# Altium PCB TCRT5000COM.PcbDoc
Units mil, origin at the board's own origin, x right, y up, seen from the top; angles counter-clockwise.
Board outline 4600 x 1000 mil, 2 copper layers (Top Layer, Bottom Layer); 44 components, 27 nets, 173 pads, 113 vias.
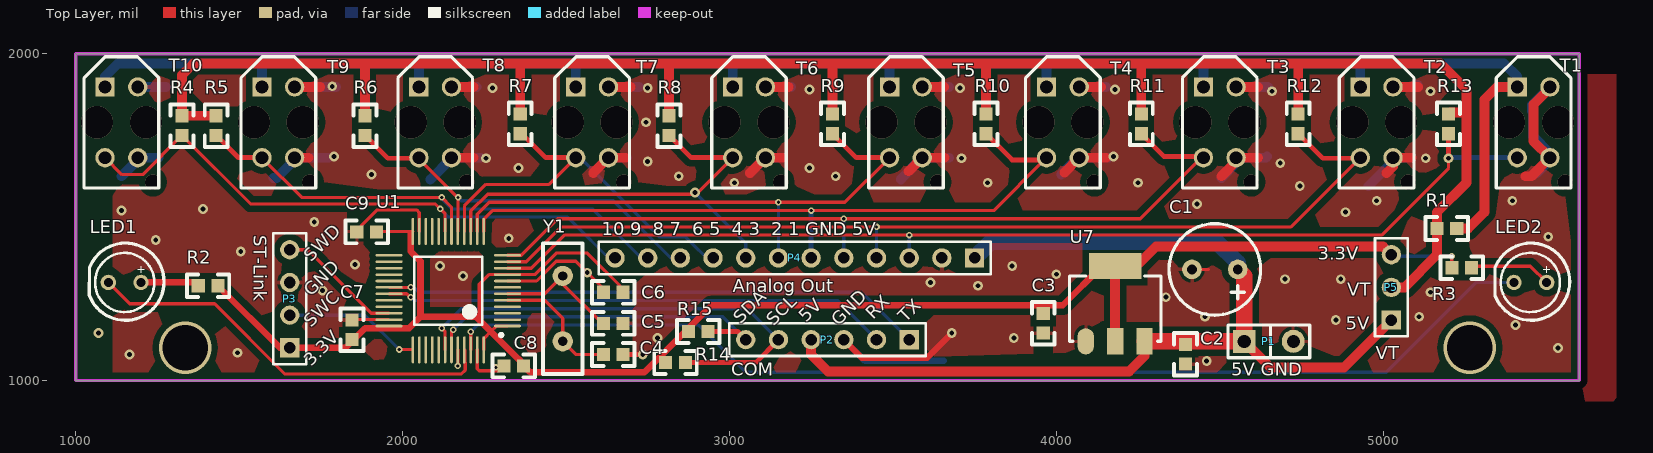
[diagram p0: Top Layer view]
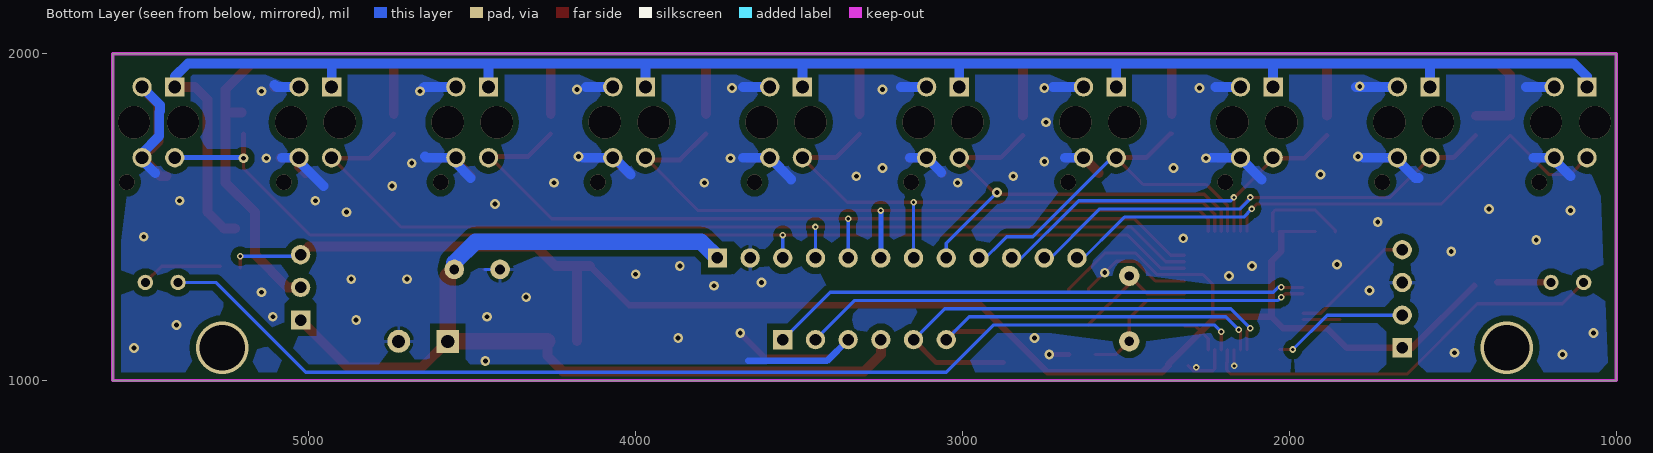
[diagram p1: Bottom Layer view, seen from below]

## Layer stack, top to bottom
Top Solder: solder mask 0.4, Solder Resist, Dk 3.5
Top Layer: signal copper 1.4
Dielectric 1: dielectric 12.6, FR-4, Dk 4.8
Bottom Layer: signal copper 1.4
Bottom Solder: solder mask 0.4, Solder Resist, Dk 3.5

## Board outline
1000,1000 1000,2000 5600,2000 5600,1000

## Design rules (kind name [scope] priority, off if disabled: settings)
Clearance Clearance_poly [Inpolygon] p1: gap=20
Clearance [All] p2: gap=8
PolygonConnect PolygonConnect_Via [IsVia] p1: connectstyle=Direct reliefconductorwidth=10 reliefentries=4 polygonreliefangle="90 Angle" airgapwidth=10
PolygonConnect [All] p2: connectstyle=Relief reliefconductorwidth=10 reliefentries=4 polygonreliefangle="90 Angle" airgapwidth=10
RoomDefinition TCRT5000COM [InComponentClass('TCRT5000COM')] p1: confinementstyle=ConfineIn formatcopy=TRUE lockcomponents=FALSE outline 1000,2000 1000,1000 5600,1000 5600,2000 1000,2000
RoutingVias [All] p1: holewidth=28 width=50 viastyle="Through Hole" minholewidth=28 minwidth=50 maxholewidth=28 maxwidth=50
SolderMaskExpansion [All] p1: expansion=4
Width [All] p1: maxlimit=50 minlimit=8 preferedwidth=10
29 further rules are at their usual default settings.

## Components (designator, comment, footprint, x,y, rotation, side; value= is the part's Value field where it differs from the comment)
C1 "47uF/10V" RB2 4555,1340 r180 top
C2 "Cap" 0603 4395,1050 r90 top
C3 "Cap" 0603 3960,1145 r90 top
C4 "20p" 0603 2615,1080 r0 top
C5 "20p" 0603 2615,1175 r0 top
C6 "Cap" 0603 2615,1270 r0 top
C7 "Cap" 0603 1845,1185 r270 top
C8 "Cap" 0603 2310,1045 r0 top
C9 "Cap" 0603 1860,1455 r0 top
LED1 "LED-white" LED-white 1200,1300 r180 top
LED2 "LED-white" LED-white 5500,1300 r180 top
P1 "5V GND" SIP2-150 4575,1120 r0 top
P2 "COM" HDR1X6 3550,1125 r180 top
P3 "ST-Link" HDR1X4 1655,1100 r90 top
P4 "Analog Out" HDR1X12 3750,1375 r180 top
P5 "VT" HDR1X3 5025,1185 r90 top
R1 "Res3" 0603 5225,1465 r180 top
R2 "Res3" 0603 1375,1290 r0 top
R3 "Res3" 0603 5270,1345 r180 top
R4 "Res3" 0603 1325,1810 r270 top
R5 "Res3" 0603 1430,1810 r270 top
R6 "Res3" 0603 1885,1810 r270 top
R7 "Res3" 0603 2360,1815 r270 top
R8 "Res3" 0603 2815,1810 r270 top
R9 "Res3" 0603 3315,1815 r270 top
R10 "Res3" 0603 3785,1815 r270 top
R11 "Res3" 0603 4260,1815 r270 top
R12 "Res3" 0603 4740,1815 r270 top
R13 "Res3" 0603 5200,1815 r270 top
R14 "Res3" 0603 2805,1055 r0 top
R15 "Res3" 0603 2875,1150 r0 top
T1 "Optoisolator1" TCRT5000 5460,1790 r90 top
T2 "Optoisolator1" TCRT5000 4980,1790 r90 top
T3 "Optoisolator1" TCRT5000 4500,1790 r90 top
T4 "Optoisolator1" TCRT5000 4020,1790 r90 top
T5 "Optoisolator1" TCRT5000 3540,1790 r90 top
T6 "Optoisolator1" TCRT5000 3060,1790 r90 top
T7 "Optoisolator1" TCRT5000 2580,1790 r90 top
T8 "Optoisolator1" TCRT5000 2100,1790 r90 top
T9 "Optoisolator1" TCRT5000 1620,1790 r90 top
T10 "Optoisolator1" TCRT5000 1140,1790 r90 top
U1 "STM32F103C8T6" QUAD48 2140,1275 r180 top
U7 "LM1117" SPP3 4090,1120 r0 top
Y1 "8M" XTAL1 2490,1320 r270 top

## Footprints (in the part's own frame and the unit in brackets; to place one, negate y for a bottom-side part, rotate by r counter-clockwise, add the part's x,y. Pads: shape width x height; smd on the part's side, far side on the other; paste and mask are expansions set on the pad)
0603 [mil]
  rect 40x40 smd: 1(0,0) 2(60,0)
  silkscreen extent -35,-35 95,35
HDR1X3 [mm] "Connector; Header; 3 Position"
  rect 1.5x1.5 hole 0.9: 1(0,0)
  round 1.5 hole 0.9: 2(2.54,0) 3(5.08,0)
  silkscreen extent -1.27,-1.27 6.35,1.27
HDR1X4 [mm] "Connector; Header; 4 Position"
  rect 1.5x1.5 hole 0.9: 1(0,0)
  round 1.5 hole 0.9: 2(2.54,0) 3(5.08,0) 4(7.62,0)
  silkscreen extent -1.27,-1.27 8.89,1.27
HDR1X6 [mm] "Connector; Header; 6 Position"
  rect 1.5x1.5 hole 0.9: 1(0,0)
  round 1.5 hole 0.9: 2(2.54,0) 3(5.08,0) 4(7.62,0) 5(10.16,0) 6(12.7,0)
  silkscreen extent -1.27,-1.27 13.97,1.27
HDR1X12 [mm] "Connector; Header; 12 Position"
  rect 1.5x1.5 hole 0.9: 1(0,0)
  round 1.5 hole 0.9: 2(2.54,0) 3(5.08,0) 4(7.62,0) 5(10.16,0) 6(12.7,0) 7(15.24,0) 8(17.78,0) 9(20.32,0) 10(22.86,0) 11(25.4,0) 12(27.94,0)
  silkscreen extent -1.27,-1.27 29.21,1.27
LED-white [mm]
  round 1.2 hole 0.7: 1(0,0) 2(2.54,0)
  silkscreen extent -1.79,-3.06 4.01,2.94, body extent -1.8,-3.07 4.01,2.95, height 5
QUAD48 [mm] "QFP, 48-Leads, Body 7x7mm, Pitch 0.5mm, IPC Low Density"
  oval 2.1x0.2 smd: 1(-4.6,2.75) 2(-4.6,2.25) 3(-4.6,1.75) 4(-4.6,1.25) 5(-4.6,0.75) 6(-4.6,0.25) 7(-4.6,-0.25) 8(-4.6,-0.75) 9(-4.6,-1.25) 10(-4.6,-1.75) 11(-4.6,-2.25) 12(-4.6,-2.75) 25(4.6,-2.75) 26(4.6,-2.25) 27(4.6,-1.75) 28(4.6,-1.25) 29(4.6,-0.75) 30(4.6,-0.25) 31(4.6,0.25) 32(4.6,0.75) 33(4.6,1.25) 34(4.6,1.75) 35(4.6,2.25) 36(4.6,2.75)
  oval 0.2x2.1 smd: 13(-2.75,-4.6) 14(-2.25,-4.6) 15(-1.75,-4.6) 16(-1.25,-4.6) 17(-0.75,-4.6) 18(-0.25,-4.6) 19(0.25,-4.6) 20(0.75,-4.6) 21(1.25,-4.6) 22(1.75,-4.6) 23(2.25,-4.6) 24(2.75,-4.6) 37(2.75,4.6) 38(2.25,4.6) 39(1.75,4.6) 40(1.25,4.6) 41(0.75,4.6) 42(0.25,4.6) 43(-0.25,4.6) 44(-0.75,4.6) 45(-1.25,4.6) 46(-1.75,4.6) 47(-2.25,4.6) 48(-2.75,4.6)
  silkscreen extent -4.23,-2.65 2.65,3.57, body extent -3.5,-3.5 3.5,3.5, height 1.6
RB2 [mil]
  round 60 hole 30: 1(0,0) 2(140,0)
  silkscreen extent -70,-140 210,140
SIP2-150 [mil]
  rect 70x70 hole 40: 1(0,0)
  round 70 hole 40: 2(150,0)
  silkscreen extent -50,-50 200,50
SPP3 [mil]
  oval 50x80 smd: 1(0,0)
  rect 50x80 smd: 2(90,0) 3(180,0)
  rect 160x80 smd: ""(90,230)
  silkscreen extent -50,0 230,200
TCRT5000 [mm]
  rect 1.5x1.5 hole 1: 1(2.75,1.27)
  round 1.5 hole 1: 2(2.75,-1.27) 3(-2.75,-1.27) 4(-2.75,1.27)
  silkscreen extent -5.1,-2.9 5.1,2.9
XTAL1 [mil]
  round 62 hole 28: 1(0,0) 2(200,0)
  silkscreen extent -100,-60 300,60

## Part data
C1: library part "CAP POL"
C2 C3 C6 C7 C8 C9: "Capacitor"
C4 C5: library part Cap, "Capacitor"
LED1 LED2: "Typical INFRARED GaAs LED"
P1: library part "Header 2", "Header, 2-Pin"
P2: library part "Header 6", "Header, 6-Pin"
P3: library part "Header 4", "Header, 4-Pin"
P4: library part "Header 12", "Header, 12-Pin"
P5: library part "Header 3", "Header, 3-Pin"
R1 R2 R3 R4 R5 R6 R7 R8 R9 R10 R11 R12 R13 R14 R15: "Resistor"
T1 T2 T3 T4 T5 T6 T7 T8 T9 T10: "4-Pin Phototransistor Optocoupler"
U1: "STM32 ARM-based 32-bit MCU Performance Line with 64 kB Flash, 20 kB Internal RAM, -40 to +85°C Temperature, 48-Pin LQFP, Tray"
Y1: library part XTAL, "Crystal Oscillator"

## Via types
v1: diameter 30, hole 15, Top Layer to Bottom Layer, 64 vias
v2: diameter 98.43, hole 98.43, Top Layer to Bottom Layer, 20 vias
v3: diameter 20, hole 10, Top Layer to Bottom Layer, 17 vias
v4: diameter 47.24, hole 47.24, Top Layer to Bottom Layer, 10 vias
v5: diameter 160, hole 140, Top Layer to Bottom Layer, 2 vias

## Nets (pads, with @x,y where several pads share a name; then routed paths per layer and width w, separated by ;. In a path a pad name is that pad's centre, name@x,y a point inside that pad or via, vN(x,y) a via of type N, cw(c..) or ccw(c..) an arc to the next point about the centre after c; other vN are vias at no path point)
3V3: C3.2 C6.2 C7.2 C8.2 C9.2 P3.1 P5.3 R2.2 R3.2 R14.1 R15.1 U1.1 U1.9 U1.24 U1.36 U1.48 U7. U7.2 | length 5549.7
  Top Layer w10: C9.2@1921.1,1456.1 U1.24 ; 2235,1185 2235,1295 2264.21,1324.21 U1.9 2404.21,1324.21 2470,1390 2565,1390 2675,1280 C6.2 ; U1.48 2248.27,1128.27 2270,1150 2286.73,1166.73 U1.1 ; R3.2 v3(5210,1380)
  Top Layer w20: R2.2 1625,1100 P3.1 1825.46,1100 1885.46,1160 2020,1160 2055,1195 ; 2025,1450 2025,1395 2055,1365 2055,1195 ; U7.@4140,1350 4020,1230 2945,1230 2740,1025 2390,1025 C8.2 2370,1050.46 2337.46,1083 2337,1083 2270,1150 2225,1195 2055,1195
  Top Layer w30: U7.@4140,1350 U7. ; U7.2 U7. ; P5.3 5000,1410 4305,1410 4245,1350 U7.
  Bottom Layer w10: P5.3 5030,1380 v3(5210,1380)
5V: C1.1 C2.2 P1.1 P2.4 P4.1 P5.1 U7.3 | length 3100.1
  Top Layer w30: P2.4 3250,1080 3302,1028 4223,1028 4270,1075 U7.3 ; P1.1 4655,1040 4880,1040 P5.1
  Top Layer w50: U7.3 P1.1 4575,1320 C1.1
  Bottom Layer w50: P4.1 3800,1425 4490,1425 4555,1360 C1.1
AIN0: P4.3 R13.2 T1.4 U1.10 | length 3410.7
  Top Layer w10: U1.10 2393.9,1343.9 2495,1445 v3(3550,1445) 4995,1445 5200,1650 v1(5200,1680)
  Top Layer w15: v1(5200,1680) R13.2
  Bottom Layer w10: P4.3@3550,1355 v3(3550,1445)
  Bottom Layer w15: v1@5200,1681.73 T1.4
AIN1: P4.4 R12.2 T2.4 U1.11 | length 3072.6
  Top Layer w10: U1.11 2378.58,1363.58 2485,1470 v3(3450,1470) 4718.27,1470 T2.4@4928.27,1680
  Top Layer w15: R12.2 4815,1680 T2.4@4928.27,1680
  Bottom Layer w10: P4.4@3450,1355 v3(3450,1470)
AIN2: P4.5 R11.2 T3.4 U1.12 | length 2606.3
  Top Layer w10: U1.12 2363.27,1383.27 2475,1495 v3(3350,1495) 4256.73,1495 T3.4@4446.73,1685
  Top Layer w15: R11.2 4330,1685 T3.4@4446.73,1685
  Bottom Layer w10: P4.5@3350,1355 v3(3350,1495)
AIN3: P4.6 R10.2 T4.4 U1.13 | length 2213.4
  Top Layer w10: U1.13 2248.27,1493.27 2275,1520 v3(3250,1520) 3808.27,1520 3963.27,1675 T4.4
  Top Layer w15: R10.2 3865,1675 T4.4@3963.27,1675
  Bottom Layer w15: P4.6@3250,1355 v3(3250,1520)
AIN4: P4.7 R9.2 T5.4 U1.14 | length 1794.2
  Top Layer w10: U1.14 2228.58,1508.58 2265,1545 v3(3150,1545) 3353.27,1545 T5.4
  Top Layer w15: R9.2 3388.27,1681.73 T5.4
  Bottom Layer w10: v3(3150,1545) 3150,1355 P4.7@3163.27,1355
AIN5: P4.8 R8.2 T6.4 U1.15 | length 1418.8
  Top Layer w10: U1.15 2208.9,1518.9 2260,1570 2898.27,1570 T6.4
  Top Layer w15: R8.2 2883.27,1681.73 T6.4
  Bottom Layer w10: v1(2895,1575) 3050,1420 P4.8
AIN6: P4.9 R7.2 T7.4 U1.16 | length 1235.7
  Top Layer w10: U1.16 2189.21,1534.21 2255,1600 2448.27,1600 T7.4
  Top Layer w15: R7.2 2365,1755 2438.27,1681.73 T7.4
  Bottom Layer w10: T7.4 2543.27,1681.73 2785,1440 2865,1440 P4.9@2950,1355
AIN7: P4.10 R6.2 T8.4 U1.17 | length 1231.3
  Top Layer w10: T8.4@2048.27,1680 2169.53,1558.74 U1.17
  Top Layer w15: R6.2 1955,1680 T8.4@2048.27,1680
  Bottom Layer w10: v3(2170,1560) 2180,1550 2645,1550 2840,1355 P4.10@2850,1355
AIN8: P4.11 R5.2 T9.4 U1.18 | length 1606.3
  Top Layer w10: T9.4 1691.73,1560 v3(2120,1560) 2149.84,1530.16 U1.18
  Top Layer w15: R5.2 1498.27,1681.73 T9.4
  Bottom Layer w10: v3@2115,1560 v3(2120,1560) ; v3@2117.5,1557.5 2117.86,1557.5 2150.36,1525 2580,1525 P4.11@2750,1355
AIN9: P4.12 R4.2 T10.4 U1.19 | length 1869.9
  Top Layer w10: T10.4 1141.73,1630 1205,1630 R4.2 1535,1540 2100,1540 v3(2115,1525) 2130.16,1509.84 U1.19
  Bottom Layer w10: v3(2115,1525) 2140,1500 2505,1500 P4.12@2650,1355
GND: C1.2 C2.1 C3.1 C4.2 C5.2 C6.1 C7.1 C8.1 C9.1 P1.2 P2.3 P3.3 P4.2 T1.2 T1.3 T2.2 T2.3 T3.2 T3.3 T4.2 T4.3 T5.2 T5.3 T6.2 T6.3 T7.2 T7.3 T8.2 T8.3 T9.2 T9.3 T10.2 T10.3 U1.8 U1.23 U1.35 U1.44 U1.47 U7.1 | length 6132
  Top Layer w10: C7.1@1846.42,1186.42 U1.35 ; C9.1 1860,1460 1922,1522 2043,1522 2051.42,1513.58 U1.23 ; v3(2168.96,1044.59) 2169.12,1044.59 2169.53,1045 U1.44 ; U1.47 2228.58,1036.42 2235,1030 2295,1030 C8.1 ; U1.8 2409.98,1304.53 2470.46,1365 2530,1365 2615,1280 C6.1 ; C1.2 4465,1340
  Top Layer w15: C4.2 v1(2735,1080)
  Top Layer w20: P2.3 3405,1070 3605,1070 v1(3680,1145)
  Top Layer w30: T9.3 1713.27,1681.73 ; T9.2 1748.27,1898.27 ; T8.3 2216.73,1681.73 ; T8.2 2216.73,1898.27 ; 2583.27,1635 T7.3 2681.73,1681.73 ; T7.2 2698.27,1898.27 ; 3063.27,1635 T6.3 3163.27,1681.73 ; T6.2 3181.73,1898.27 ; 3548.27,1640 T5.3 3658.27,1681.73 ; T5.2 3656.73,1898.27 ; 4025,1636.73 T4.3 4151.73,1681.73 ; T4.2 4136.73,1898.27 ; 4505,1625 4550,1670 T3.3 4616.73,1681.73 ; T3.2 4616.73,1898.27 ; 5010,1635 5030,1655 T2.3 5086.73,1681.73 ; T2.2 5106.73,1898.27 ; 5435,1625 5453.27,1625 T1.3 5460,1731.73 5460,1845 5510,1895 T1.2
  Bottom Layer w10: C1.2 4460,1340
  Bottom Layer w20: P2.3 3415,1060 3655,1060
  Bottom Layer w30: 1140,1625 1190,1675 T10.3 1253.27,1681.73 ; T10.2 1276.73,1898.27 ; 1605,1620 1615,1620 1670,1675 T9.3 1773.27,1681.73 ; T9.2 v1@1796.73,1898.27 ; 2085,1615 2150,1680 T8.3 2238.27,1681.73 ; T8.2 2226.73,1898.27 ; T7.3 2686.73,1681.73 ; T7.2 2723.27,1898.27 ; 3065,1636.73 T6.3 3161.73,1681.73 ; T6.2 3188.27,1898.27 ; 3525,1615 3525,1616.73 T5.3 3671.73,1681.73 ; T5.2 3671.73,1898.27 ; 4015,1630 4066.73,1681.73 T4.3 v1@4161.73,1681.73 ; T4.2 4151.73,1898.27 ; 4505,1620 4550,1665 T3.3 4641.73,1681.73 4645,1685 ; T3.2 4646.73,1898.27 v1@4650,1895 ; 4955,1595 5030,1670 T2.3 5081.73,1681.73 ; T2.2 5098.27,1898.27 5105,1905 ; 5470,1635 5510,1675 T1.3 5510,1695 5457.41,1747.59 5457.41,1822.32 5455,1824.73 5455,1843.27 T1.2
  other v1: 4460,1060 1165,1080 1495,1085 5535,1100 2780,1130 3870,1130 1070,1145 5405,1170 4855,1185 4455,1195 5110,1195 4335,1255 5145,1270 1755,1275 3760,1290 3615,1300 4700,1310 4870,1310 2185,1320 4000,1325 2565,1330 2115,1350 3865,1350 1855,1355 1505,1395 1245,1430 2325,1435 5505,1440 1730,1485 4885,1515 1140,1520 1390,1525 4430,1540 4980,1550 5395,1550 4745,1595 3015,1605 3790,1605 4250,1605 2845,1625 3325,1625 1905,1630 2355,1650 3245,1650 4685,1665 2750,1670 2255,1680 3710,1680 5130,1680 1790,1685 4175,1685 2745,1790 4660,1885 5145,1885 3245,1890 4180,1890 2275,1895 2750,1895 3705,1895 1785,1900
  other v3: 2285,1040
NetC4_1: C4.1 U1.5 Y1.2 | length 383.4
  Top Layer w10: U1.5 2434.53,1245.47 2490,1190 Y1.2 2530,1080 C4.1@2595,1080
NetC5_1: C5.1 U1.6 Y1.1 | length 393.4
  Top Layer w10: U1.6 2435.16,1265.16 Y1.1 2490,1295 C5.1@2615,1170
NetLED1_1: LED1.1 R2.1 | length 165
  Top Layer w20: LED1.1 R2.1@1365,1300
NetLED2_1: LED2.1 R3.1 | length 250.7
  Top Layer w10: R3.1@5270,1350 5450,1350 LED2.1
NetR1_1: R1.1 T1.1 T2.1 T3.1 T4.1 T5.1 T6.1 T7.1 T8.1 T9.1 T10.1 | length 5554.1
  Top Layer w30: R1.1 5260,1465 5310,1515 5310,1860 5348.27,1898.27 T1.1
  Bottom Layer w30: T10.1 1090,1930 1130,1970 2050,1970 ; T9.1 1570,1965 ; T8.1 2050,1970 ; T7.1 2530,1970 ; T6.1 3010,1970 ; T5.1 3490,1970 ; T4.1 3970,1965 3975,1970 ; T3.1 4450,1970 ; T2.1 4930,1970 ; T1.1 5410,1930 5370,1970 4930,1970 ; 2050,1970 2530,1970 ; 2530,1970 3010,1970 ; 3010,1970 3490,1970 ; 3490,1970 3975,1970 ; 3975,1970 4450,1970 ; 4450,1970 4930,1970
RXD1: P2.2 U1.31 | length 1549.2
  Top Layer w10: U1.31 2012.32,1265.16 2022.47,1255 v3(2025,1255)
  Bottom Layer w10: v3(2025,1255) 2035,1245 3330,1245 P2.2
SCL1: P2.5 R14.2 U1.42 | length 1468.5
  Top Layer w10: v3(2120,1160) 2130.16,1149.84 U1.42
  Top Layer w15: R14.2@2875,1055 3080,1055 P2.5
  Bottom Layer w10: v3(2120,1160) 2180,1220 3055,1220 P2.5
SDA1: P2.6 R15.2 U1.43 | length 1129.2
  Top Layer w10: U1.43 2149.84,1149.84 v3(2155,1155)
  Top Layer w15: R15.2 3025,1150 P2.6
  Bottom Layer w10: v3(2155,1155) 2195,1195 2980,1195 P2.6
SWCLK: P3.2 U1.37 | length 419.1
  Top Layer w10: v3(1990,1095) U1.37@2030.63,1095
  Bottom Layer w10: P3.2 1885,1200 v3(1990,1095)
SWDIO: P3.4 U1.34 | length 384.2
  Top Layer w10: P3.4 1710,1400 1903.9,1206.1 U1.34
TIM4-3: LED1.2 U1.45 | length 1276
  Top Layer w10: LED1.2 1165,1235 1425,1235 1640,1020 2180,1020 2191.96,1031.96 2191.96,1054.12 2190.03,1056.05 2190.03,1093.08 U1.45
TIM4-4: LED2.2 U1.46 | length 3428.8
  Top Layer w10: U1.46 v3(2208.9,1148.9)
  Bottom Layer w10: v3(2208.9,1148.9) 2230,1170 2905,1170 3050,1025 5010,1025 5285,1300 LED2.2
TXD1: P2.1 U1.30 | length 1657.4
  Top Layer w10: U1.30 v3@2025,1284.84
  Bottom Layer w10: v3(2025,1285) 2035,1285 2050,1270 3405,1270 P2.1
VT: P5.2 R1.2 R4.1 R5.1 R6.1 R7.1 R8.1 R9.1 R10.1 R11.1 R12.1 R13.1 | length 6051.3
  Top Layer w30: R5.1 R4.1 1325,1935 1360,1970 4260,1970 ; R6.1 1885,1965 ; R7.1 2360,1965 ; R8.1 2815,1965 ; R9.1 3315,1965 ; R10.1 3785,1965 ; R11.1 4260,1970 ; R12.1 4740,1970 ; P5.2 5065,1285 5165,1385 R1.2 5165,1515 5255,1605 5255,1820 ; R13.1@5205,1820 5255,1820 ; 4260,1970 4740,1970 ; 4740,1970 5175,1970 5255,1890 5255,1820
pads on no net: U1.2 U1.3 U1.4 U1.7 U1.20 U1.21 U1.22 U1.25 U1.26 U1.27 U1.28 U1.29 U1.32 U1.33 U1.38 U1.39 U1.40 U1.41
copper on no net:
  other v2: 1065.2,1790 1214.8,1790 1545.2,1790 1694.8,1790 2025.2,1790 2174.8,1790 2505.2,1790 2654.8,1790 2985.2,1790 3134.8,1790 3465.2,1790 3614.8,1790 3945.2,1790 4094.8,1790 4425.2,1790 4574.8,1790 4905.2,1790 5054.8,1790 5385.2,1790 5534.8,1790
  other v4: 1236.46,1606.93 1716.46,1606.93 2196.46,1606.93 2676.46,1606.93 3156.46,1606.93 3636.46,1606.93 4116.46,1606.93 4596.46,1606.93 5076.46,1606.93 5556.46,1606.93
  other v5: 1335,1100 5265,1100

## Polygon pours and split planes (outlines as drawn)
GND on Top Layer "TopLayer-GND" (solid, pour order 2): 1113.25,1937.07 5713.25,1937.07 5713.25,947.07 5703.25,937.07 1113.25,937.07 1113.25,1927.07
GND on Bottom Layer "BottomLayer-GND" (solid, pour order 4): 1000,2000 5600,2000 5600,1000 1000,1000 1000,2000

## Keep-outs
Keep-Out Layer:
  the board outline again, w10

## Silkscreen, mask and mechanical layers (free items; w line width, h text height)
Top Overlay:
  text "10 9  8 7  6 5  4 3  2 1 GND 5V" at 2610,1445 h40
  text "3.3V" at 4800,1370 h40
  text "SWD" at 1720,1360 h40 r45
  text "VT" at 4890,1260 h40
  text "GND" at 1720,1255 h40 r45
  text "RX" at 3440,1185 h40 r45
  text "5V" at 3235,1175 h40 r45
  text "TX" at 3540,1175 h40 r45
  text "SDA" at 3035,1170 h40 r45
  text "SCL" at 3135,1165 h40 r45
  text "GND" at 3335,1165 h40 r45
  text "SWC" at 1720,1160 h40 r45
  text "5V" at 4885,1155 h40
  text "3.3V" at 1720,1040 h40 r45